# EAGLE board Arduino Ibus (EAGLE 6.5.0)
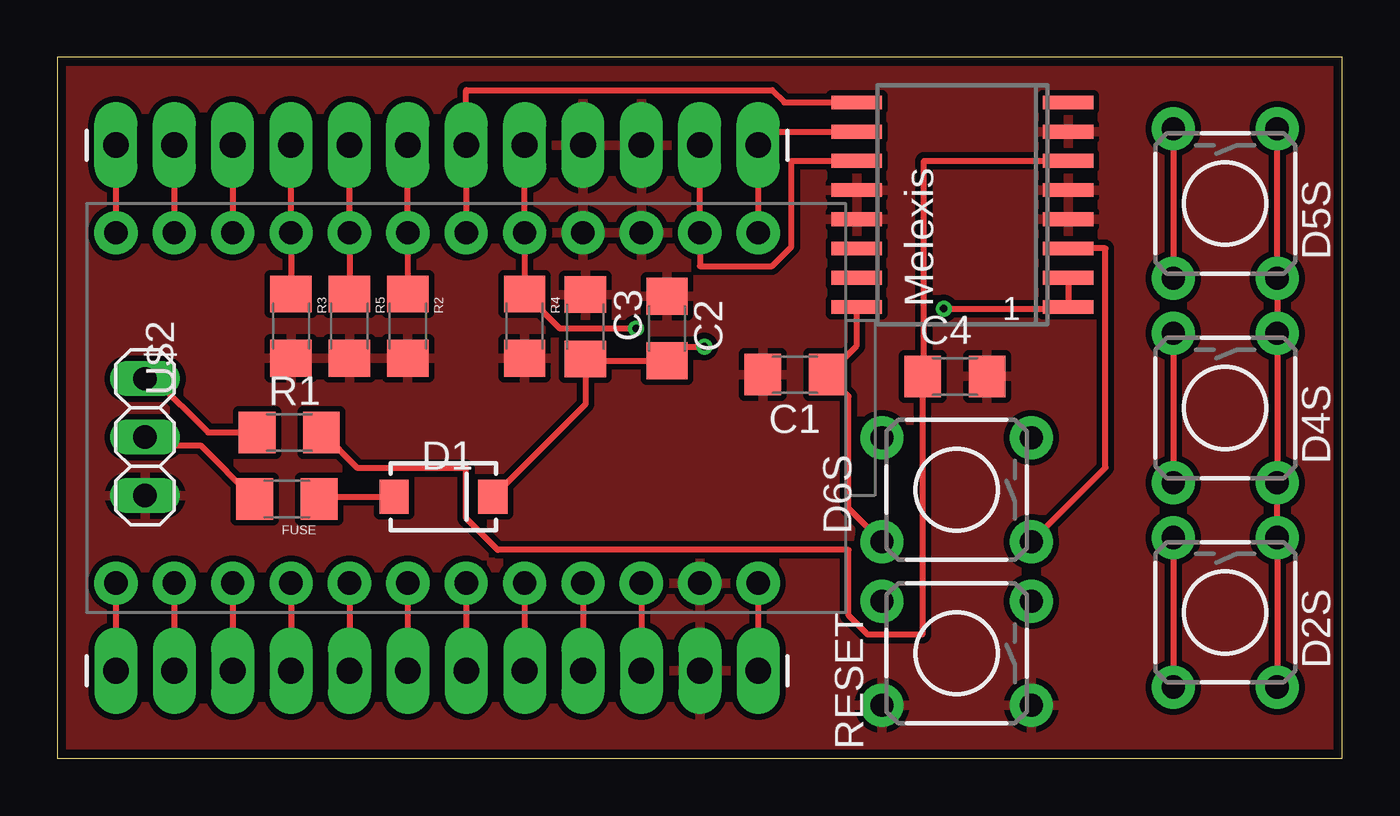
[diagram p0: board, top side]
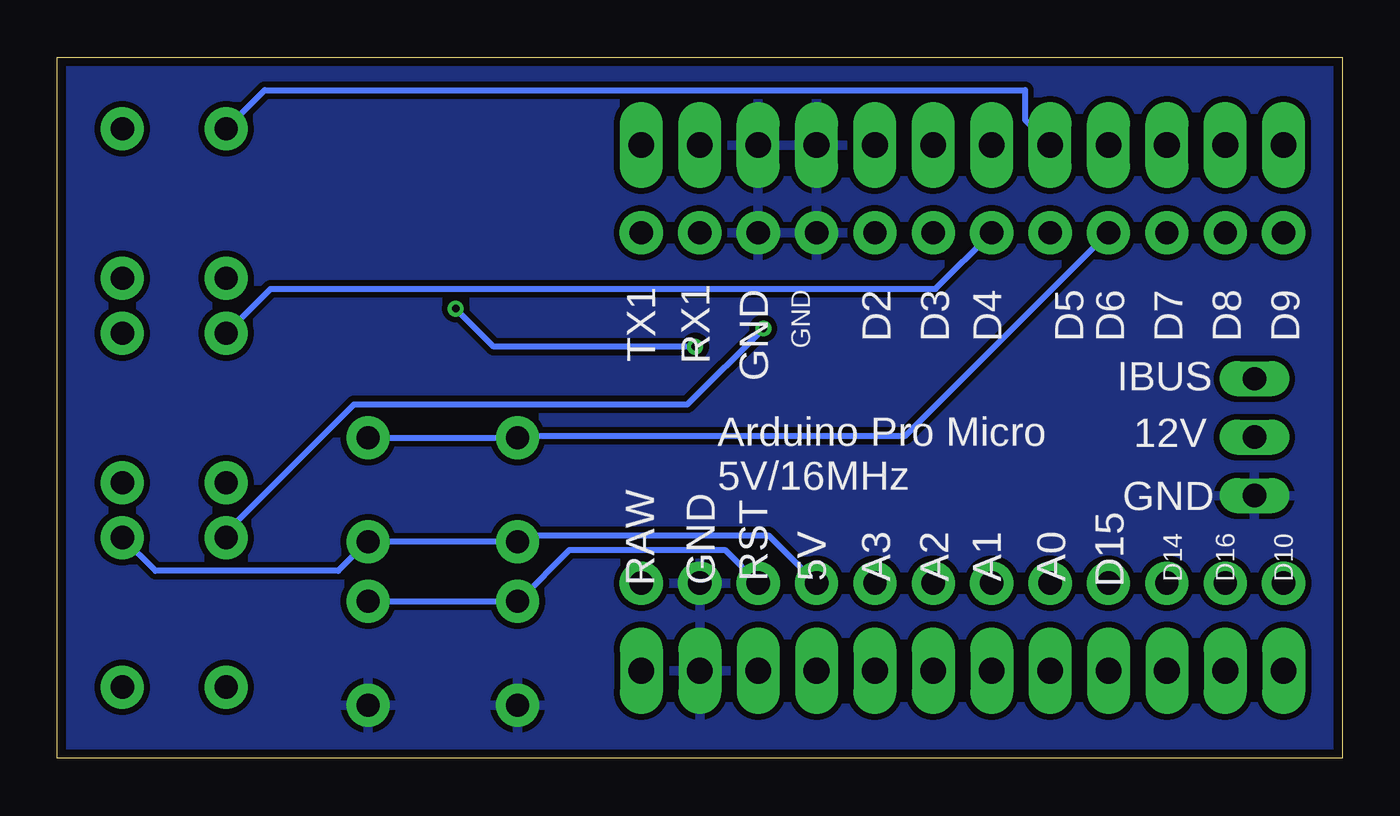
[diagram p1: board, bottom side, seen from below]

Size 55.88 x 30.48 mm. Coordinates in mm from the lower left corner, seen from the top.
Outline: 0,0 55.88,0 55.88,30.48 0,30.48 0,0
Copper layers (1*16): Top 0.0356mm / dielectric 1.5011mm / Bottom 0.0356mm
Design rules "LaenPCBOrder": minimum track width 6mil, minimum drill 13mil, track to track 6mil, track to pad 6mil, pad to pad 6mil, via to via 6mil, smd to smd 6mil, copper to edge 15mil, drill to drill 6mil, minimum pad ring 7mil, minimum via ring 7mil, stop-mask expansion 4mil, vias tented up to drill 0mil, thermal gap 10mil
Net classes: 0 default: width 0.254 mm, drill 0.254 mm, clearance 0.381 mm; 1 GND: width 0.254 mm, drill 0.254 mm, clearance 0.254 mm; 2 POWER: width 0.254 mm, drill 0.254 mm, clearance 0.254 mm

## Footprints (pad centres in the part's own frame; a part is rotated, then mirrored left to right if it is on the bottom)
C1206 = smd 1.6 x 1.8: 1 -1.4,0; 2 1.4,0
SMA-DIODE = smd 1.27 x 1.47: A -2.15,0; C 2.15,0
TACTILE-PTH = drill 1.016 pad 1.88: 1 -3.251,2.261; 2 3.251,2.261; 3 -3.251,-2.261; 4 3.251,-2.261
1206 = smd 1.6 x 1.8: 1 -1.4,0; 2 1.4,0
1X12_LONGPADS = drill 1.118 pad 1.88 long: 1 0,0; 2 2.54,0; 3 5.08,0; 4 7.62,0; 5 10.16,0; 6 12.7,0; 7 15.24,0; 8 17.78,0; 9 20.32,0; 10 22.86,0; 11 25.4,0; 12 27.94,0
1X03 = drill 1.016 long: 1 -2.54,0; 2 0,0; 3 2.54,0
SO16W = smd 0.6 x 2.2: 1 -4.445,-4.6; 2 -3.175,-4.6; 3 -1.905,-4.6; 4 -0.635,-4.6; 5 0.635,-4.6; 6 1.905,-4.6; 7 3.175,-4.6; 8 4.445,-4.6; 9 4.445,4.6; 10 3.175,4.6; 11 1.905,4.6; 12 0.635,4.6; 13 -0.635,4.6; 14 -1.905,4.6; 15 -3.175,4.6; 16 -4.445,4.6
ARDUINO_PRO_MICRO = drill 1.016 pad 1.88: 1 -7.62,12.7; 2 -7.62,10.16; 3 -7.62,7.62; 4 -7.62,5.08; 5 -7.62,2.54; 6 -7.62,0; 7 -7.62,-2.54; 8 -7.62,-5.08; 9 -7.62,-7.62; 10 -7.62,-10.16; 11 -7.62,-12.7; 12 -7.62,-15.24; 13 7.62,-15.24; 14 7.62,-12.7; 15 7.62,-10.16; 16 7.62,-7.62; 17 7.62,-5.08; 18 7.62,-2.54; 19 7.62,0; 20 7.62,2.54; 21 7.62,5.08; 22 7.62,7.62; 23 7.62,10.16; 24 7.62,12.7

## Placement (x,y rotation side)
C1  6.8uF  [C1206]  32.08,16.69 180 top
C2  100uF  [C1206]  26.52,18.69 90 top
C3  .047uF  [C1206]  22.96,18.77 90 top
C4  82pF  [C1206]  39.04,16.61 0 top
D1  1N4148  [SMA-DIODE]  16.79,11.38 0 top
D2S  [TACTILE-PTH]  50.8,6.35 270 top
D4S  [TACTILE-PTH]  50.8,15.24 270 top
D5S  [TACTILE-PTH]  50.8,24.13 270 top
D6S  [TACTILE-PTH]  39.12,11.68 180 top
FUSE  [1206]  9.98,11.28 180 top
JP1  M12LONGPADS  [1X12_LONGPADS]  2.54,26.67 0 top
JP2  M12LONGPADS  [1X12_LONGPADS]  30.48,3.81 180 top
JP6  [1X03]  3.81,13.97 90 top
R1  10  [1206]  10.08,14.17 0 top
R2  10k  [1206]  15.24,18.8 270 top
R3  10k  [1206]  10.16,18.8 270 top
R4  10k  [1206]  20.32,18.8 270 top
R5  10k  [1206]  12.7,18.8 270 top
RESET  [TACTILE-PTH]  39.12,4.57 180 top
U$1  TH3122  [SO16W]  39.37,24.08 90 top
U$2  ARDUINO_PRO_MICRO  [ARDUINO_PRO_MICRO]  17.78,15.24 270 top

## Library data of the parts
C1-C4 = resistor
D1 = SparkFun-DiscreteSemi
D2S D4S D5S D6S RESET = SparkFun-Electromechanical
FUSE R1-R5 = SparkFun-Passives
JP1 JP2 = SparkFun-Connectors
JP6 = pinhead
U$1 = Melexisth3122
U$2 = SparkFun-Boards

## Nets
12V [POWER]: FUSE.2 JP6.2
+5V [POWER]: C1.1 D2S.1 D2S.2 D4S.1 D4S.2 D5S.1 D5S.2 D6S.1 D6S.2 JP2.4 U$1.3 U$1.16 U$2.21
+12V [POWER]: D1.A FUSE.1
A0: JP2.8 U$2.17
A1: JP2.7 U$2.18
A2: JP2.6 U$2.19
A3: JP2.5 U$2.20
D2: D2S.3 D2S.4 JP1.8 R4.1 U$2.5
D3: JP1.7 U$1.9 U$2.6
D4: D4S.3 D4S.4 JP1.6 R2.1 U$2.7
D5: D5S.3 D5S.4 JP1.5 R5.1 U$2.8
D6: D6S.3 D6S.4 JP1.4 R3.1 U$2.9
D7: JP1.3 U$2.10
D8: JP1.2 U$2.11
D9: JP1.1 U$2.12
D10: JP2.12 U$2.13
D11: JP2.11 U$2.14
D12: JP2.10 U$2.15
D13: JP2.9 U$2.16
GND [GND]: C1.2 C2.2 C3.2 C4.2 JP1.9 JP1.10 JP2.2 JP6.1 R2.2 R3.2 R4.2 R5.2 RESET.1 RESET.2 U$1.4 U$1.5 U$1.7 U$1.12 U$1.13 U$2.3 U$2.4 U$2.23
IBUS: JP6.3 R1.1
N$3: C2.1 C3.1 D1.C U$1.1 U$1.2
N$4: C4.1 R1.2 U$1.6
RAW: JP2.1 U$2.24
RESET: JP2.3 RESET.3 RESET.4 U$2.22
RXD: JP1.11 U$1.11 U$2.2
TXD: JP1.12 U$1.10 U$2.1

## Tracks (layer width: path | path; a pad name or v marks a point on that pad's centre or on a via)
12V
  Top 0.254: JP6.2 3.81,13.61 6.22,13.61 8.56,11.28 FUSE.2
+5V
  Top 0.254: D2S.2 D2S.1 D4S.2 D4S.1 D5S.2 D5S.1 | U$1.3 45.59,22.17 45.59,12.65 D6S.1 | U$2.21 JP2.4 | U$1.16 34.75,19.63 34.75,17.93 33.5,16.69 C1.1 33.58,16.59 34.42,15.75 34.42,10.87 D6S.2
  Bottom 0.254: U$2.21 24.94,9.7 35.59,9.7 D6S.2 D6S.1 42.47,9.35 43.66,8.15 51.61,8.15 D2S.1
+12V
  Top 0.254: D1.A 11.4,11.38 11.4,11.28 FUSE.1
A0
  Top 0.254: U$2.17 JP2.8
A1
  Top 0.254: U$2.18 JP2.7
A2
  Top 0.254: U$2.19 JP2.6
A3
  Top 0.254: U$2.20 JP2.5
D2  (via drill 0.33)
  Top 0.254: JP1.8 U$2.5 R4.1 20.42,20.14 21.87,18.69 v25.17,18.69 | D2S.3 D2S.4
  Bottom 0.254: v25.17,18.69 28.47,15.39 42.98,15.39 48.54,9.83 D2S.3
D3
  Top 0.254: U$1.9 31.62,28.52 31.09,29.06 17.78,29.06 JP1.7 U$2.6
D4
  Top 0.254: R2.1 U$2.7 JP1.6 | D4S.3 D4S.4
  Bottom 0.254: U$2.7 17.68,20.42 46.61,20.42 D4S.3
D5
  Top 0.254: R5.1 U$2.8 JP1.5 | D5S.3 D5S.4
  Bottom 0.254: JP1.5 13.79,27.76 13.79,29.06 46.86,29.06 D5S.3
D6
  Top 0.254: R3.1 U$2.9 JP1.4
  Bottom 0.254: D6S.3 D6S.4 35.76,14.02 19,14.02 U$2.9
D7
  Top 0.254: JP1.3 U$2.10
D8
  Top 0.254: JP1.2 U$2.11
D9
  Top 0.254: JP1.1 U$2.12
D10
  Top 0.254: U$2.13 JP2.12
D11
  Top 0.254: U$2.14 JP2.11
D12
  Top 0.254: U$2.15 JP2.10
D13
  Top 0.254: U$2.16 JP2.9
GND
  pour Bottom: 0,0 0,30.48 55.88,30.48 55.88,0
  pour Top: 0,0 0,30.48 55.88,30.48 55.88,0
IBUS
  Top 0.254: R1.1 6.55,14.17 4.22,16.51 JP6.3
N$3  (via drill 0.33)
  Top 0.254: U$1.2 U$1.1 43.87,19.56 v38.56,19.56 | D1.C 22.96,15.39 C3.1 23.06,17.3 C2.1 26.59,17.4 26.59,17.91 v28.14,17.91
  Bottom 0.254: v38.56,19.56 36.91,17.91 v28.14,17.91
N$4
  Top 0.254: R1.2 11.51,14.17 13.06,12.62 17.78,12.62 17.78,10.44 19.15,9.07 34.42,9.07 34.42,6.22 35.26,5.38 37.62,5.38 37.62,16.61 C4.1 37.69,16.71 37.69,25.98 U$1.6
RAW
  Top 0.254: U$2.24 JP2.1
RESET
  Top 0.254: U$2.22 JP2.3
  Bottom 0.254: RESET.3 RESET.4 35.76,6.91 33.6,9.07 26.85,9.07 U$2.22
RXD
  Top 0.254: U$1.11 31.93,25.98 31.93,22.25 31.09,21.41 27.94,21.41 U$2.2 JP1.11
TXD
  Top 0.254: U$1.10 30.48,27.25 JP1.12 U$2.1

## Text on the board
tNames: 1
bNames: RX1 | TX1 | D9 | D8 | D7 | D6 | D5 | D4 | D3 | D2 | GND | GND | IBUS | 12V | Arduino Pro Micro / 5V/16MHz | GND | RAW | GND | D10 | D16 | D14 | A0 | A1 | A2 | A3 | 5V | RST | D15